# Altium PCB 高压小功率FOC驱动板.PcbDoc (part 2 of 2)
Units mm, origin at the board's own origin, x right, y up, seen from the top; angles counter-clockwise.
Board outline 64 x 64 mm, 4 copper layers (Top Layer, Mid-Layer 1, Mid-Layer 2, Bottom Layer), stack 2.282 mm thick; 170 components, 96 nets, 418 pads, 185 vias.
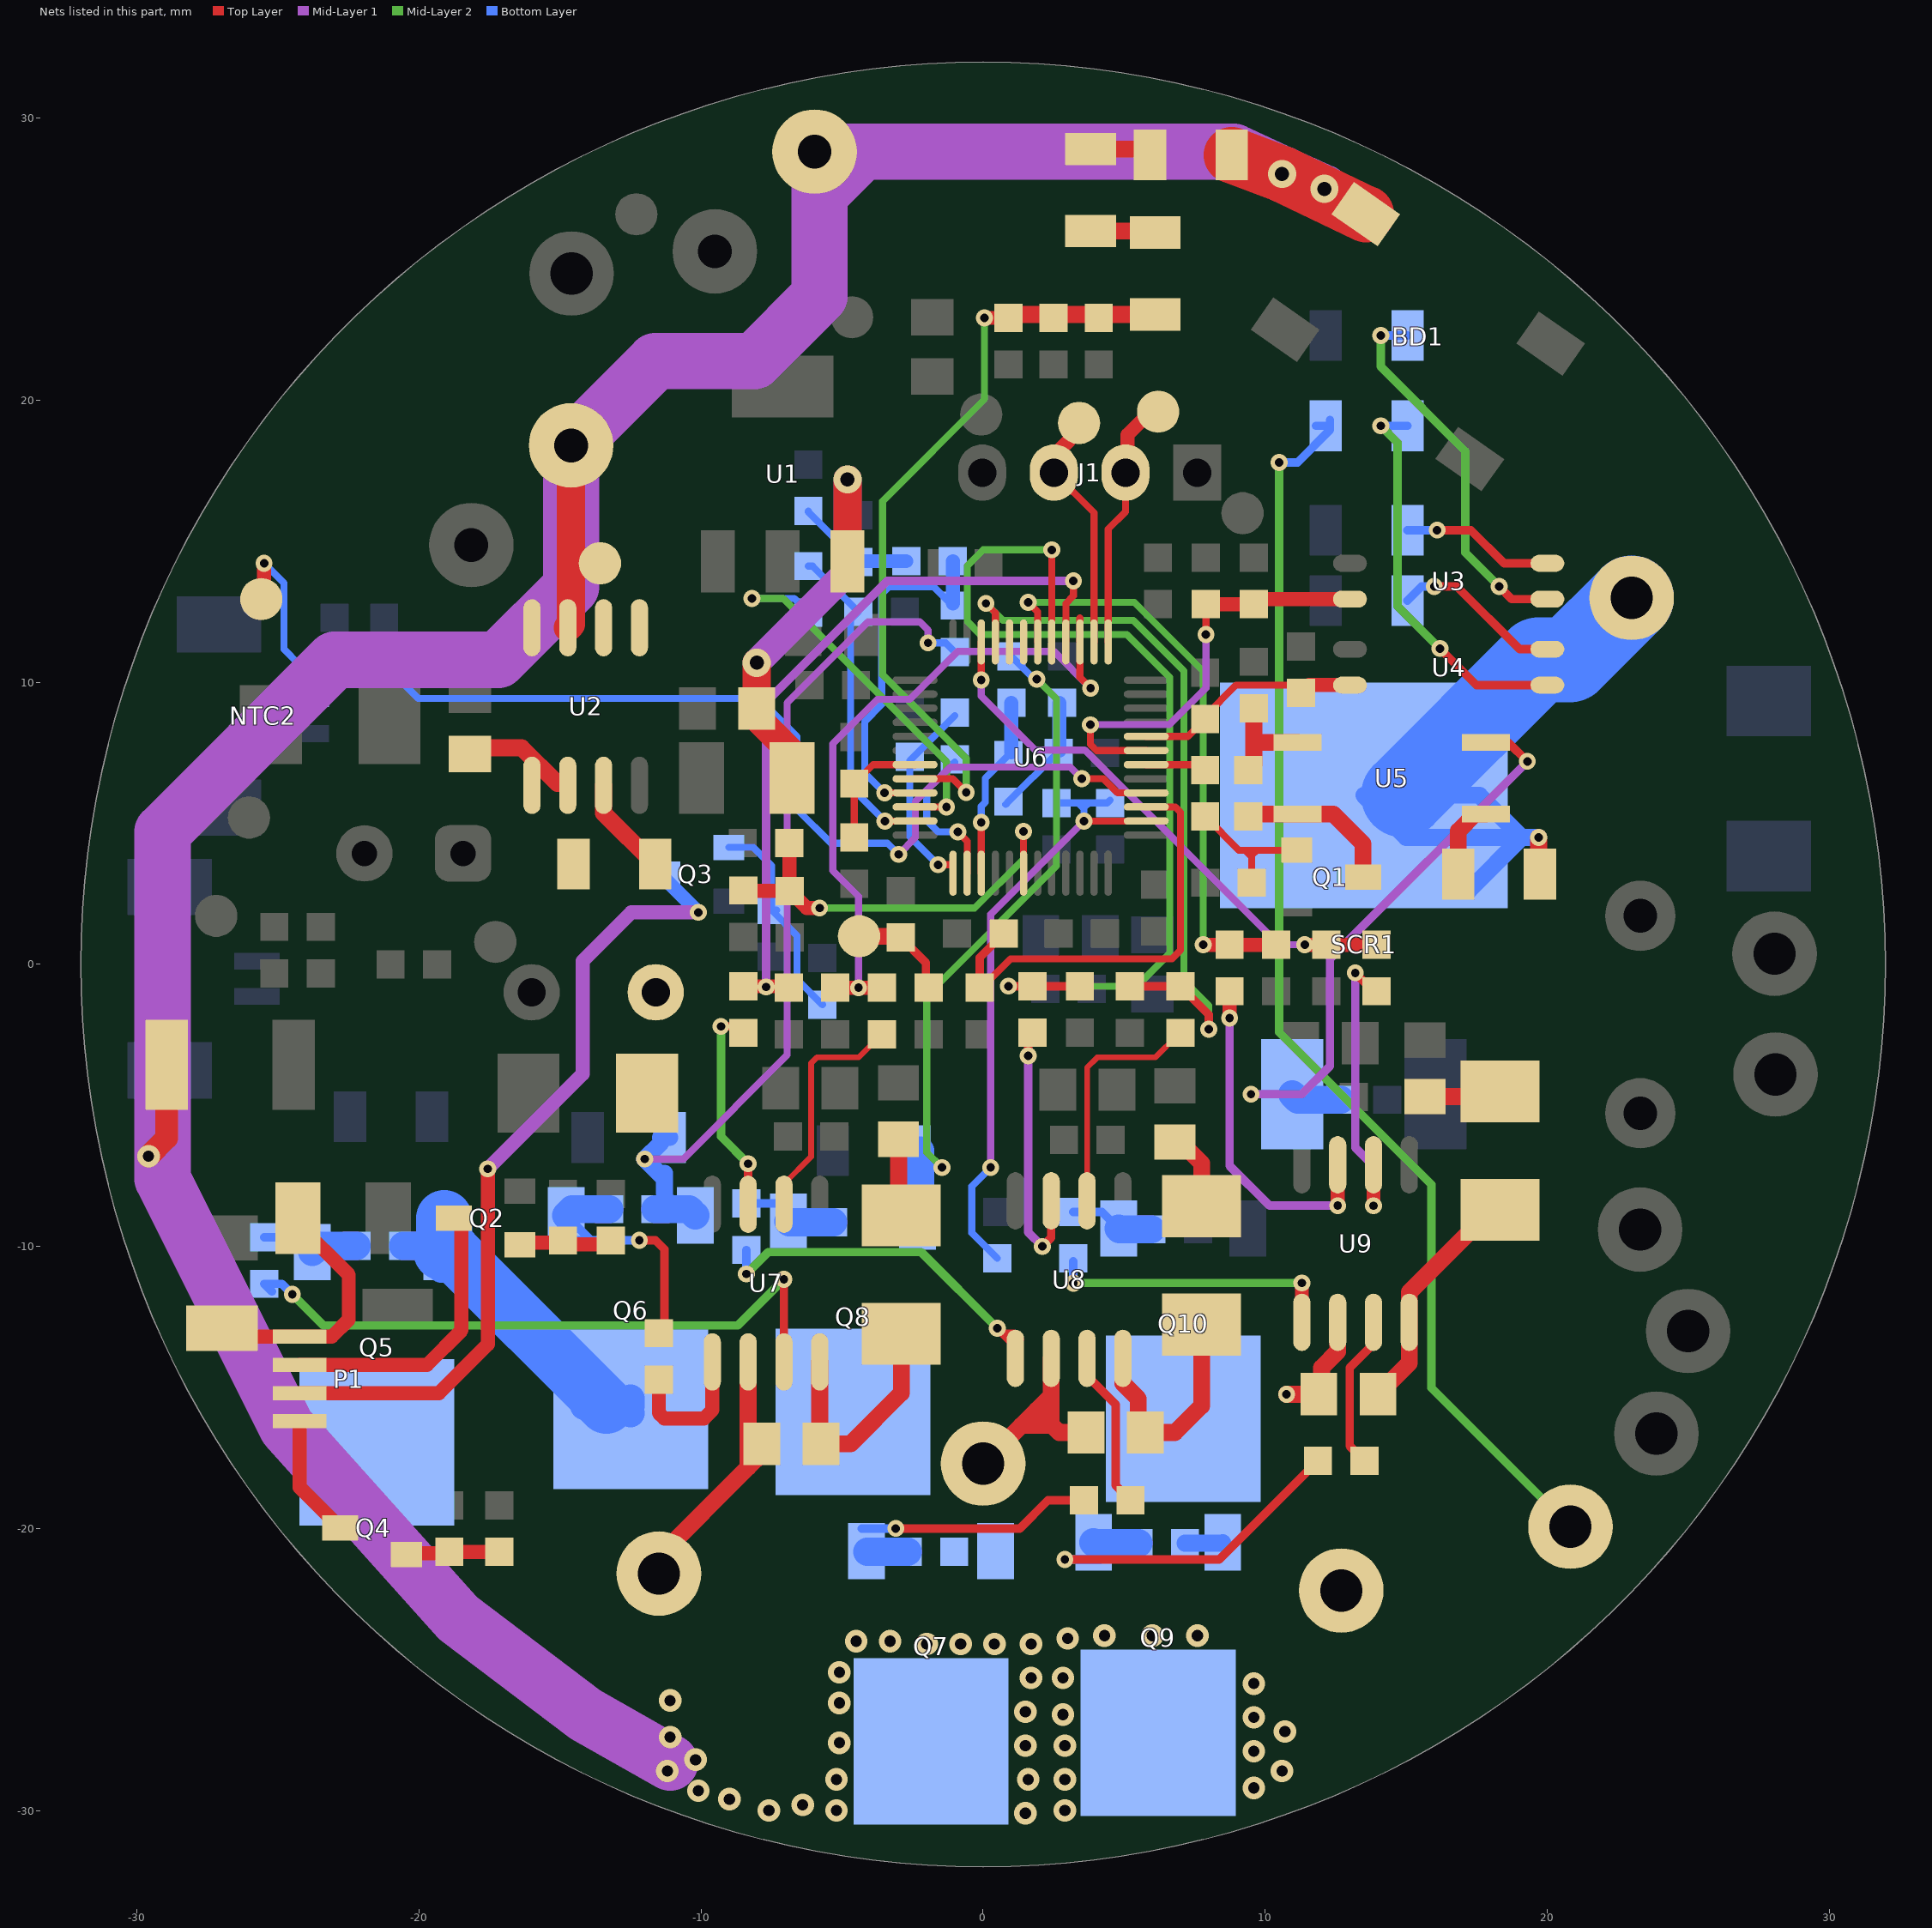
[diagram p4: the nets of this part, all layers, seen from the top]

## Via types
v1: diameter 0.6, hole 0.3, Top Layer to Bottom Layer, tented both sides, 128 vias
v2: diameter 0.8, hole 0.4, Top Layer to Bottom Layer, tented both sides, 40 vias
v3: diameter 1, hole 0.5, Top Layer to Bottom Layer, tented both sides, 17 vias

## Nets (pads, with @x,y where several pads share a name; then routed paths per layer and width w, separated by ;. In a path a pad name is that pad's centre, name@x,y a point inside that pad or via, vN(x,y) a via of type N, cw(c..) or ccw(c..) an arc to the next point about the centre after c; other vN are vias at no path point) (continued)
NetC1_2: C1.2 D2.K L1.1 R1.1 U2.1 U2.2 | length 3.6
  Top Layer w0.6: C1.2@-18.2,7.684 -16.37,7.684 -15.1,6.414
NetC6_2: C6.2 R2.1 U1.3 | length 15.4
  Top Layer w1: v3(-8.031,10.7) C6.2@-8.031,9.075 -8.031,8.75 -6.782,7.501 R2.1@-6.782,6.604 ; U1.3@-4.812,14.289 v3(-4.812,17.2)
  Mid-Layer 1 w1: v3(-8.031,10.7) -4.812,13.919 v3(-4.812,17.2)
NetC17_2: C17.2 NTC2.1 R21.1 Tp6.1 U6.28 | length 43.7
  Top Layer w0.25: Tp6.1@-25.6,12.954 Tp6.1@-25.5,13.054 ; v1(3.5,6.584) 4.266,6.584 4.766,6.084 U6.28@5.783,6.084
  Top Layer w0.5: Tp6.1@-25.5,13.054 v1(-25.5,14.225)
  Mid-Layer 1 w0.25: v1(-3,3.9) -2.4,4.5 -2.4,5.775 -1.175,7 3.084,7 v1(3.5,6.584)
  Bottom Layer w0.25: v1(-25.5,14.225) -24.8,13.525 -24.8,11.175 -24.272,10.647 R21.1@-23,10.647 -23,9.909 NTC2.1@-23.564,9.344 ; C17.2@-21.246,10.647 -20.033,9.434 -7.959,9.434 -6.6,8.075 -6.6,5.5 -5.4,4.3 -3.4,4.3 v1(-3,3.9)
  Bottom Layer w0.5: R21.1@-23,10.647 C17.2@-21.246,10.647
NetC31_1: C31.1 D3.K U7.8 | length 8.6
  Top Layer w0.6: U7.8@-5.795,-14.093 -5.795,-16.955 C31.1@-5.75,-17 -4.7,-17 -2.9,-15.2 D3.K@-2.9,-13.1
NetC34_1: C34.1 D4.K U8.8 | length 8.3
  Top Layer w0.6: U8.8@4.953,-13.969 4.953,-14.853 5.5,-15.4 C34.1@5.5,-16.8 ; C34.1@5.75,-16.6 6.8,-16.6 7.747,-15.653 D4.K@7.747,-12.768
NetC38_1: C38.1 D5.K U9.8 | length 8.2
  Top Layer w0.6: C38.1@14.004,-15.24 15.113,-14.131 U9.8@15.113,-12.691 15.113,-11.625 D5.K@18.034,-8.704
NetD3_A: D3.A R51.2 | length 2.5
  Top Layer w0.6: R51.2@-3,-6.4 -3,-8.8 D3.A@-2.9,-8.9
NetD4_A: D4.A R61.2 | length 2.6
  Top Layer w0.6: R61.2@7,-6.3 7.747,-7.047 D4.A@7.747,-8.568
NetD5_A: D5.A R71.2 | length 2.7
  Top Layer w0.6: R71.2@15.367,-4.683 17.855,-4.683 D5.A@18.034,-4.504
NetF-_1: F-.1 R13.1 SCR1.2 | length 28
  Top Layer w0.6: v1(19.7,4.5) 19.7,3.25 R13.1@19.75,3.2
  Bottom Layer w0.6: SCR1.2@17.25,2.65 19.1,4.5 ; v1(19.7,4.5) 19.1,4.5 ; 19.1,4.5 15,4.5 SCR1.2@13.5,6 14.9,6 17.6,6 19.1,4.5
  Bottom Layer w3: SCR1.2@14.9,6 19.7,10.8 20.8,10.8 F-.1@23,13
NetP1_1: P1.1 Q4.C | length 4.4
  Top Layer w0.5: P1.1@-24.238,-16.2 -24.238,-18.543 Q4.C@-22.803,-19.978
NetP1_2: P1.2 Q3.C | length 29.1
  Top Layer w0.5: P1.2@-24.238,-15.2 -19.3,-15.2 -17.568,-13.468 v1(-17.568,-7.25)
  Mid-Layer 1 w0.5: v1(-17.568,-7.25) -14.2,-3.882 -14.2,0.122 -12.477,1.845 v1(-10.1,1.845)
  Bottom Layer w0.5: Q3.C@-11.375,3.2 -11.375,3.12 v1(-10.1,1.845)
NetP1_3: P1.3 Q2.C | length 10.3
  Top Layer w0.5: P1.3@-24.238,-14.2 -19.725,-14.2 -18.5,-12.975 Q2.C@-18.5,-8.9
NetP1_4: P1.4 R26.2 R27.2 | length 9.2
  Top Layer w0.5: R27.2@-27,-12.9 -26.7,-13.2 P1.4@-24.238,-13.2 -23.1,-13.2 -22.5,-12.6 -22.5,-11 -24.3,-9.2 R26.2@-24.3,-9
NetQ1_B: Q1.B R16.1 R17.1 | length 5.5
  Top Layer w0.25: R16.1@7.874,5.244 9.068,4.05 9.3,4.05 ; R17.1@9.525,2.9 9.525,3.825 ; Q1.B@11.125,4.05 9.7,4.05 ; 9.3,4.05 9.5,4.05 ; 9.3,4.05 9.525,3.825 ; 9.5,4.05 9.7,4.05 ; 9.5,4.05 9.525,4.025 9.525,3.875 ; 9.525,3.825 9.525,3.875 ; 9.525,3.875 9.7,4.05
NetQ1_C: Q1.C R15.1 U5.2 | length 5.7
  Top Layer w0.6: R15.1@9.398,5.244 9.488,5.334 U5.2@11.151,5.334 12.416,5.334 13.475,4.275 Q1.C@13.475,3.1
NetQ2_B: Q2.B R20.1 R22.1 | length 3.4
  Top Layer w0.5: Q2.B@-16.425,-9.943 -16.349,-9.866 -14.977,-9.866 R22.1@-14.9,-9.79 -14.764,-9.926 -13.336,-9.926 R20.1@-13.2,-9.79
NetQ3_B: Q3.B R31.1 R33.1 | length 7.6
  Bottom Layer w0.25: Q3.B@-9.025,4.15 -8.15,4.15 -7.5,3.5 R33.1@-7.5,1.925 ; R33.1@-7.325,1.925 R33.1@-7.5,1.925 ; R31.1@-5.7,-1.425 -6.6,-0.525 -6.6,1.025 R33.1@-7.5,1.925
NetQ4_B: Q4.B R36.1 R37.1 | length 3.3
  Top Layer w0.5: Q4.B@-20.453,-20.928 -20.404,-20.879 -18.983,-20.879 R37.1@-18.934,-20.83 R36.1@-17.156,-20.83
NetQ6_S: Q6.S R28.2 R59.2 R60.2 | length 31.3
  Mid-Layer 1 w0.25: v1(-12,-6.9) -10.636,-6.9 -6.95,-3.214 -6.95,9.275 -4.075,12.15 -2.25,12.15 -1.954,11.854 v1(-1.954,11.4)
  Bottom Layer w0.25: v1(-1.954,11.4) -1.325,11.4 R28.2@-1,11.075
  Bottom Layer w0.6: R60.2@-11.439,-6.339 v1(-12,-6.9) -11.3,-7.6 ; R60.2@-11.439,-6.139 R60.2@-11.123,-6.139 ; -11.3,-8.1 -11.3,-7.4
  Bottom Layer w1: R59.2@-11.621,-8.679 -11.1,-8.679 ; R59.2@-11.123,-8.656 -11.1,-8.679 ; Q6.S@-10.21,-8.9 -10.431,-8.679 -11.1,-8.679
NetQ8_S: Q8.S R42.1 R69.2 R70.2 | length 24.9
  Mid-Layer 2 w0.25: v1(-1.46,-7.2) -2,-6.66 -2,-1.104 2.6,3.496 2.6,9.415 v1(1.9,10.115)
  Bottom Layer w0.25: R42.1@1,10.925 1.81,10.115 v1(1.9,10.115)
  Bottom Layer w1: R69.2@-3.666,-9.144 -2.356,-9.144 Q8.S@-2.328,-9.116 -2.233,-9.021 R70.2@-2.233,-6.604
NetR1_2: R1.2 U2.3 | length 3.6
  Top Layer w0.6: U2.3@-13.462,6.35 -13.462,5.362 -11.656,3.556 R1.2@-11.631,3.556
NetR5_2: R5.2 U3.1 | length 13.5
  Top Layer w0.3: v1(18.3,13.4) 18.746,12.954 U3.1@20.01,12.954
  Mid-Layer 2 w0.3: v1(14.1,22.3) 14.1,21.2 17.1,18.2 17.1,14.6 v1(18.3,13.4)
  Bottom Layer w0.3: v1(14.1,22.3) R5.2@15.05,22.3
NetR7_2: R7.2 U3.2 | length 5.4
  Top Layer w0.3: v1(16.1,15.4) 17.3,15.4 18.476,14.224 U3.2@20.01,14.224
  Bottom Layer w0.3: R7.2@15.05,15.4 v1(16.1,15.4)
NetR9_1: R9.1 S.1 | length 45
  Mid-Layer 2 w0.3: v1(10.5,17.8) 10.5,-2.4 15.9,-7.8 15.9,-15.011 S.1@20.828,-19.939
  Bottom Layer w0.3: v1(10.5,17.8) 11.15,17.8 12.3,18.95 R9.1@12.3,19.3 ; R9.1@11.8,19.1 R9.1@12.15,19.1
NetR9_2: R9.2 U4.1 | length 14.1
  Top Layer w0.3: v1(16.2,11.2) 17.494,9.906 U4.1@20.01,9.906
  Mid-Layer 2 w0.3: v1(14.1,19.1) 14.7,18.5 14.7,12.7 v1(16.2,11.2)
  Bottom Layer w0.3: v1(14.1,19.1) R9.2@15.05,19.1
NetR11_1: R11.1 SCR1.3 U5.4 | length 21.9
  Top Layer w0.3: U5.4@17.826,7.874 18.626,7.874 v1(19.3,7.2)
  Mid-Layer 1 w0.3: v1(9.5,-4.6) 11.303,-4.6 12.3,-3.603 12.3,0.2 v1(19.3,7.2)
  Bottom Layer w0.3: v1(9.5,-4.6) SCR1.3@10.96,-4.6
  Bottom Layer w1: SCR1.3@10.96,-4.6 11.16,-4.8 R11.1@12.675,-4.8
NetR12_2: R12.2 U4.2 | length 6.1
  Top Layer w0.3: v1(16,13.4) 16.8,13.4 19.024,11.176 U4.2@20.01,11.176
  Bottom Layer w0.3: R12.2@15.05,12.9 15.55,13.4 v1(16,13.4)
NetR13_2: R13.2 U5.3 | length 2.8
  Top Layer w0.6: R13.2@16.85,3.2 16.85,4.734 17.45,5.334 U5.3@17.826,5.334
NetR14_1: R14.1 R15.2 U5.1 | length 3.8
  Top Layer w0.6: R15.2@9.398,6.894 9.6,7.096 R14.1@9.6,9.081 ; 9.6,7.874 U5.1@11.151,7.874
NetR23_2: R23.2 R81.2 R82.1 | length 4.2
  Bottom Layer w0.25: R81.2@-6.2,16.075 -6.2,16.05 R82.1@-4.425,14.275 R82.1@-4.4,14.3
  Bottom Layer w0.5: R82.1@-4.4,14.3 R23.2@-2.725,14.3
NetR30_2: R30.2 R32.2 Tp7.1 | length 3.6
  Top Layer w0.3: R30.2@-2.921,0.953 -2.032,0.064 R32.2@-2.032,-0.826
  Top Layer w0.6: Tp7.1@-4.4,1 -2.968,1 R30.2@-2.921,0.953
NetR39_2: R39.2 R41.1 | length 2.2
  Top Layer w0.6: R41.1@3.81,28.909 5.709,28.909 R39.2@5.916,28.702
NetR41_2: R41.2 R44.1 | length 2.3
  Top Layer w0.6: R41.2@3.81,26.009 6.041,26.009 R44.1@6.1,25.95
NetR43_2: R43.2 R83.2 R84.1 | length 4.4
  Bottom Layer w0.25: R43.2@0.8,5.675 R43.2@0.9,5.775 R84.1@2.625,7.5 ; R84.1@2.675,7.5 R84.1@2.625,7.5 ; R84.1@2.7,7.575 R84.1@2.625,7.5
  Bottom Layer w0.5: R84.1@2.7,7.575 R83.2@2.7,9.275
NetR54_1: R54.1 U7.7 | length 23
  Top Layer w0.3: U7.7@-7.065,-14.093 v1(-7.065,-11.165)
  Mid-Layer 2 w0.3: v1(-24.5,-11.7) -23.4,-12.8 -8.7,-12.8 v1(-7.065,-11.165)
  Bottom Layer w0.3: R54.1@-25.225,-11.6 R54.1@-25.5,-11.325 -24.875,-11.325 v1(-24.5,-11.7)
NetR57_1: R57.1 U7.5 | length 5
  Top Layer w0.5: R57.1@-11.5,-14.725 -11.5,-15.91 -11.31,-16.1 -9.9,-16.1 -9.605,-15.805 U7.5@-9.605,-14.093
NetR64_1: R64.1 U8.7 | length 5.7
  Top Layer w0.3: U8.7@3.683,-13.969 3.683,-14.583 4.7,-15.6 4.7,-18.475 R64.1@5.225,-19
NetR67_1: R67.1 U8.5 | length 13.2
  Top Layer w0.3: v1(0.5,-12.9) v1@0.7,-13.1 ; U8.5@1.143,-13.969 1.143,-13.543 v1@0.7,-13.1 ; U8.5@1.3,-13.3 1.1,-13.1 v1@0.7,-13.1
  Mid-Layer 2 w0.3: v1(-8.4,-10.977) -7.623,-10.2 -2.2,-10.2 v1(0.5,-12.9)
  Bottom Layer w0.3: v1(-8.4,-10.977) R67.1@-8.4,-10.125
NetR74_1: R74.1 U9.7 | length 5.5
  Top Layer w0.3: R74.1@13.525,-17.6 13,-17.075 13,-14.3 13.843,-13.457 U9.7@13.843,-12.691
NetR77_1: R77.1 U9.5 | length 10.4
  Top Layer w0.5: U9.5@11.303,-12.691 v1(11.303,-11.297)
  Mid-Layer 2 w0.3: v1@3.2,-11.297 v1(11.303,-11.297)
  Bottom Layer w0.3: v1@3.2,-11.4 R77.1@3.2,-10.525
  other v1: 3.2,-11.3
NRST: C15.1 R18.2 U6.7 | length 4.3
  Top Layer w0.25: R18.2@-4.572,4.508 C15.1@-4.572,6.414 -3.902,7.084 U6.7@-2.417,7.084
NTC: C28.2 NTC.1 R45.2 U6.26 | length 22.9
  Top Layer w0.25: v1(3.575,5.084) U6.26@5.783,5.084
  Mid-Layer 1 w0.25: v1(0.268,-7.2) 0.268,1.777 v1(3.575,5.084)
  Bottom Layer w0.25: v1(0.268,-7.2) -0.4,-7.868 -0.4,-9.525 NTC.1@0.5,-10.425 ; R45.2@2.6,5.725 3.375,5.725 ; v1(3.575,5.084) 3.575,5.525 ; C28.2@4.5,5.825 4.4,5.725 3.738,5.725 ; 3.375,5.725 3.575,5.525 ; 3.375,5.725 3.5,5.725 ; 3.5,5.725 3.738,5.725 ; 3.5,5.725 3.575,5.65 3.575,5.562 ; 3.575,5.525 3.575,5.562 ; 3.575,5.562 3.738,5.725
OP1_VINM: R25.1 R29.2 U6.11 | length 11.5
  Top Layer w0.25: v1(-3.484,5.084) U6.11@-2.417,5.084
  Bottom Layer w0.25: R25.1@-6.2,14.125 -6.05,14.125 R29.2@-4.425,12.5 -4.7,12.225 -4.7,6.3 v1(-3.484,5.084)
OP1_VINP: R23.1 R28.1 U6.9 | length 13
  Top Layer w0.25: v1(-3.494,6.084) U6.9@-2.417,6.084
  Bottom Layer w0.25: v1(-3.494,6.084) -4.2,6.79 -4.2,8.616 -3.6,9.216 -3.6,13.135 -3.35,13.385 -1.748,13.385 R28.1@-1.2,12.837 ; R28.1@-1.075,12.8 R28.1@-1,12.725
  Bottom Layer w0.5: R28.1@-1.075,12.8 R23.1@-1.075,14.3
OP1_VOUT: R25.2 U6.10 | length 14.2
  Top Layer w0.25: U6.10@-2.417,5.584 v1(-1.3,5.584)
  Mid-Layer 2 w0.25: v1(-8.2,12.975) -7.091,12.975 -1.3,7.184 v1(-1.3,5.584)
  Bottom Layer w0.25: v1(-8.2,12.975) -6.7,12.975 R25.2@-6.2,12.475
OP2_VINM: R38.1 R40.1 U6.13 | length 6.9
  Top Layer w0.25: v1(-1.6,3.534) U6.13@-1.067,3.534
  Bottom Layer w0.25: v1(-1.6,3.534) -2.6,4.534 -2.6,7.159 -2.6,7.225 R38.1@-1,8.825
OP2_VINP: R42.2 R43.1 U6.15 | length 6.5
  Top Layer w0.25: U6.15@-0.067,3.234 v1(-0.067,5.033)
  Bottom Layer w0.25: v1(-0.067,5.033) -0.067,5.608 0.075,5.75 0.075,6.6 R43.1@0.9,7.425 R43.1@1,7.525
  Bottom Layer w0.5: R43.1@1,7.525 R42.2@1,9.275
OP2_VOUT: R38.2 U6.14 | length 5.4
  Top Layer w0.25: v1(-0.9,4.7) -0.567,4.367 U6.14@-0.567,3.234
  Bottom Layer w0.25: R38.2@-1,7.084 -1,7.175 -2,6.175 -2,5.1 -1.6,4.7 v1(-0.9,4.7)
OP3_VINP: C18.1 R24.1 U6.27 | length 16
  Top Layer w0.25: C18.1@0,-0.772 0.972,0.2 6.7,0.2 7,0.5 7,5.4 6.816,5.584 U6.27@5.783,5.584
  Top Layer w0.3: C18.1@-0.127,-0.826 -0.127,0.248 R24.1@0.725,1.1
SWCLK1: J1.3 Tp3.1 U6.38 | length 8.7
  Top Layer w0.25: J1.3@2.508,17.439 3.933,16.014 U6.38@3.933,11.434
  Top Layer w0.3: J1.3@2.508,17.439 J1.3@2.508,17.935
  Top Layer w0.5: J1.3@2.508,17.935 2.529,17.935 2.738,18.143 2.738,18.267 3.4,18.929 Tp3.1@3.4,19.2
SWDIO1: J1.2 Tp2.1 U6.37 | length 9.1
  Top Layer w0.25: U6.37@4.433,11.434 4.433,15.433 5.048,16.048 J1.2@5.048,17.439
  Top Layer w0.5: J1.2@5.048,17.439 5.121,17.512 5.121,18.779 5.942,19.6 Tp2.1@6.204,19.6
TIM1_CH1: R16.2 U6.30 | length 2.2
  Top Layer w0.25: U6.30@5.783,7.084 7.684,7.084 R16.2@7.874,6.894
TIM1_CH2: C10.1 R4.1 U3.4 U6.31 | length 15.4
  Top Layer w0.25: v1(3.8,8.5) 3.8,7.8 4.016,7.584 U6.31@5.783,7.584 ; v1(7.9,11.7) C10.1@7.9,12.575 ; R4.1@9.6,12.775 9.6,12.908 R4.1@9.646,12.954
  Top Layer w0.5: C10.1@7.9,12.775 R4.1@9.6,12.775 ; R4.1@9.646,12.954 U3.4@13.01,12.954
  Mid-Layer 1 w0.25: v1(3.8,8.5) 6.602,8.5 7.9,9.798 v1(7.9,11.7)
TIM1_CH3: C11.1 R8.2 U4.4 U6.32 | length 8.4
  Top Layer w0.25: U6.32@5.783,8.084 7.258,8.084 C11.1@7.874,8.7 7.874,8.815 8.965,9.906 R8.2@11.5,9.906
  Top Layer w0.5: R8.2@11.269,9.625 11.55,9.906 U4.4@13.01,9.906
TIM8_BKIN: U6.44
TIM8_BKIN2: U6.43
TIM8_CH1: R52.1 R53.1 U6.39 | length 24.4
  Top Layer w0.25: 3.433,12.283 U6.39@3.433,11.434 3.433,10.177 v1(3.81,9.8)
  Top Layer w0.5: R53.1@-5.245,-0.826 v1(-4.42,-0.826) R52.1@-3.594,-0.826
  Mid-Layer 1 w0.25: v1(-4.42,-0.826) -4.42,2.42 -5.334,3.334 -5.334,7.816 -3.75,9.4 -2.6,9.4 -0.9,11.1 2.51,11.1 v1(3.81,9.8)
TIM8_CH1N: R56.1 R58.1 U6.40 | length 26.7
  Top Layer w0.25: U6.40@2.933,11.434 2.933,12.799 3.2,13.066 v1(3.2,13.6)
  Top Layer w0.3: R58.1@-6.947,-0.775 R58.1@-6.896,-0.826
  Top Layer w0.5: R56.1@-8.5,-0.775 R58.1@-6.947,-0.775
  Mid-Layer 1 w0.3: v1(-7.696,-0.8) -7.696,9.304 -3.4,13.6 v1(3.2,13.6)
TIM8_CH2: R62.1 R63.1 U6.45 | length 26.3
  Top Layer w0.25: v1(0.1,12.8) 0.433,12.467 U6.45@0.433,11.434
  Top Layer w0.3: R63.1@5.2,-0.775 R62.1@7,-0.775 8,-1.775 v1(8,-2.3)
  Mid-Layer 2 w0.25: v1(0.1,12.8) 0.7,12.2 5.325,12.2 7.117,10.408 7.117,-0.576 8,-1.459 v1(8,-2.3)
TIM8_CH2N: R66.1 R68.1 U6.41 | length 35
  Top Layer w0.25: U6.41@2.433,11.434 v1(2.433,14.7)
  Top Layer w0.3: v1(0.9,-0.772) R66.1@1.751,-0.772 R68.1@3.429,-0.772
  Mid-Layer 2 w0.25: v1(0.9,-0.772) 5.451,-0.772 6.617,0.394 6.617,10.183 5.1,11.7 -0.1,11.7 -0.567,12.167 -0.567,14.133 0,14.7 v1(2.433,14.7)
TIM8_CH3: R72.1 R73.1 U6.46 | length 19.6
  Top Layer w0.25: v1(-0.067,10.084) U6.46@-0.067,11.434
  Top Layer w0.5: v1(11.405,0.698) R73.1@12.17,0.698 R72.1@13.948,0.698
  Mid-Layer 1 w0.25: v1(-0.067,10.084) -0.067,9.513 1.846,7.6 3.6,7.6 10.502,0.698 v1(11.405,0.698)
TIM8_CH3N: R76.1 R78.1 U6.42 | length 21.2
  Top Layer w0.25: v1(1.6,12.837) 1.933,12.504 U6.42@1.933,11.434
  Top Layer w0.3: v1@7.8,0.7 v1(7.802,0.698) ; R76.1@8.6,0.839 R76.1@8.741,0.698
  Top Layer w0.5: v1(7.802,0.698) R76.1@8.741,0.698 R78.1@10.392,0.698
  Mid-Layer 2 w0.25: v1(1.6,12.837) 5.363,12.837 7.802,10.398 v1(7.802,0.698)
U: C31.2 Q5.S Q6.D R55.2 U7.6 U.1 | length 24.3
  Top Layer w0.6: U.1@-11.5,-21.6 -11.5,-21 -8.335,-17.835 ; U7.6@-8.335,-14.093 C31.2@-8.335,-16.515 ; -8.335,-17.835 -7.85,-17.35 C31.2@-7.85,-17 C31.2@-8.335,-16.515 ; -8.335,-17.835 C31.2@-8.335,-16.515
  Bottom Layer w1: R55.2@-20.568,-9.979 -19.431,-9.979 Q5.S@-19.21,-10.2 Q5.S@-19.21,-10.79 ; Q6.D@-14.15,-15.65 -13.367,-15.65 Q6.D@-12.76,-15.65 ; Q6.D@-12.5,-15.91 Q6.D@-12.76,-15.65 ; Q6.D@-12.5,-15.4 Q6.D@-12.5,-15.65 Q6.D@-12.76,-15.65
  Bottom Layer w2: Q5.S@-19.21,-10.2 Q5.S@-18.817,-10.2 ; -19.118,-9 -19.118,-9.899 Q5.S@-18.817,-10.2 ; Q5.S@-18.8,-10.2 Q5.S@-18.817,-10.2 ; Q6.D@-13.367,-15.65 Q5.S@-18.817,-10.2
UH: Q5.G R54.2 R55.1 | length 3.6
  Bottom Layer w0.3: R54.2@-25.5,-9.675 -24.315,-9.675 Q5.G@-23.79,-10.2
  Bottom Layer w1: Q5.G@-23.79,-10.2 -23.569,-9.979 R55.1@-22.218,-9.979
UH_PWM: R52.2 U7.2 | length 8.3
  Top Layer w0.2: U7.2@-7.065,-8.505 -7.065,-7.782 -6.1,-6.817 -6.1,-3.5 -5.9,-3.3 -4.418,-3.3 R52.2@-3.594,-2.476
UL: Q6.G R57.2 R59.1 | length 10.6
  Top Layer w0.3: v1(-12.192,-9.779) -11.621,-9.779 -11.3,-10.1 -11.3,-12.875 R57.2@-11.5,-13.075
  Bottom Layer w0.3: Q6.G@-14.79,-8.9 -13.911,-9.779 ; Q6.G@-14.721,-9.779 -13.911,-9.779 ; R59.1@-13.6,-9.008 R59.1@-13.271,-8.679 ; -13.2,-9.779 -13.911,-9.779 ; v1(-12.192,-9.779) -13.911,-9.779
  Bottom Layer w1: Q6.G@-14.79,-8.9 -14.569,-8.679 R59.1@-13.271,-8.679
UL_PWM: R56.2 U7.3 | length 7.6
  Top Layer w0.3: v1(-9.3,-2.2) -8.725,-2.2 R56.2@-8.5,-2.425 ; U7.3@-8.335,-8.505 v1(-8.335,-7.065)
  Mid-Layer 2 w0.3: v1(-9.3,-2.2) -9.3,-6.1 v1(-8.335,-7.065)
V: C34.2 Q7.S Q8.D R65.2 U8.6 V.1 | length 8.9
  Top Layer w0.6: V.1@0,-17.7 1.35,-16.35 ; U8.6@2.413,-13.969 2.413,-15.287 ; C34.2@3.65,-16.6 2.7,-16.6 2.45,-16.35 ; 1.35,-16.35 2.45,-16.35 ; 1.35,-16.35 1.9,-15.8 ; 1.9,-15.8 2.413,-15.287 ; 1.9,-15.8 2.413,-16.313 ; 2.413,-16.313 2.413,-15.287 ; 2.413,-16.313 2.45,-16.35
V15: C27.1 R46.2 R50.2 U6.18 | length 15.1
  Top Layer w0.25: U6.18@1.433,3.234 v1(1.433,4.717)
  Top Layer w0.5: R50.2@-8.5,2.625 -8.478,2.603 C27.1@-6.858,2.603 ; R46.2@-6.875,4.3 -6.875,2.62 C27.1@-6.858,2.603 ; v1(-5.8,2) -6.255,2 C27.1@-6.858,2.603
  Mid-Layer 2 w0.25: v1(-5.8,2) -0.3,2 1.433,3.733 v1(1.433,4.717)
VBAT: C26.1 R44.2 R47.2 R48.2 U6.8 | length 27.7
  Top Layer w0.25: U6.8@-2.417,6.584 -1.084,6.584 v1(-0.6,6.1)
  Top Layer w0.5: v1(0.043,22.925) C26.1@0.9,22.925
  Top Layer w0.6: C26.1@0.9,22.925 1.025,23.05 R44.2@6.1,23.05
  Mid-Layer 2 w0.25: v1(-0.6,6.1) -0.6,7.3 -3.566,10.266 -3.566,16.434 0.043,20.043 v1(0.043,22.925)
VBUS: 310V.1 BD1.1 C2.1 C3.1 C36.1 Q5.D Q7.D Q9.D R39.1 U2.5 U2.6 U2.7 U2.8 | length 115.5
  Top Layer w0.8: v2(-29.6,-6.8) -28.956,-6.156 C36.1@-28.956,-3.556
  Top Layer w1: U2.7@-14.732,11.938 -14.615,12.055 C3.1@-14.615,18.405
  Top Layer w2: R39.1@8.816,28.702 v3(10.6,28.03) 12.026,27.346 BD1.1@13.573,26.604
  Mid-Layer 1 w2: v2@-11.1,-28.3 -14.1,-26.6 -18.6,-23.2 -24.7,-16.4 -29.1,-7.6 -29.1,4.7 -23,10.8 -17.2,10.8 -14.615,13.385 C3.1@-14.615,18.405 -11.62,21.4 -8.1,21.4 -5.8,23.7 -5.8,27.3 ; C2.1@-5.979,28.819 C2.1@-5.8,28.819 ; C2.1@-5.8,29 C2.1@-5.8,28.819 ; v3@12.04,27.37 v3(10.6,28.03) 8.881,28.819 -4.281,28.819 ; -5.8,27.3 -4.281,28.819 ; -5.8,27.3 C2.1@-5.8,28.819 ; C2.1@-5.8,28.819 -4.281,28.819
  other v2: 1.5,-30.1 -7.6,-30 -5.2,-30 2.9,-30 -6.4,-29.8 -9,-29.6 -10.1,-29.3 9.6,-29.2 -5.2,-28.9 1.6,-28.9 2.9,-28.9 -11.2,-28.6 10.6,-28.6 -10.2,-28.2 9.6,-27.9 1.5,-27.7 2.9,-27.7 -5.1,-27.6 -11.1,-27.4 10.7,-27.2 9.6,-26.7 2.829,-26.6 1.5,-26.5 -5.1,-26.188 -11.1,-26.1 9.6,-25.5 1.7,-25.3 2.829,-25.3 -5.1,-25.1 -2,-24.1 -0.8,-24.1 0.4,-24.1 1.7,-24.1 -4.5,-24 -3.3,-24 3,-23.9 4.3,-23.8 6,-23.8 7.6,-23.8
  other v3: 12.1,27.5
VH: Q7.G R64.2 R65.1 | length 9.8
  Top Layer w0.3: v1(-3.1,-20) 1.3,-20 2.3,-19 R64.2@3.575,-19
  Bottom Layer w0.3: Q7.G@-4.3,-20 v1(-3.1,-20)
  Bottom Layer w0.6: Q7.G@-4.141,-20.8 Q7.G@-4.113,-20.828
  Bottom Layer w1: Q7.G@-4.113,-20.828 R65.1@-2.676,-20.828
VH_PWM: R62.2 U8.2 | length 8.4
  Top Layer w0.2: U8.2@3.683,-8.381 3.683,-3.661 4.044,-3.3 6.1,-3.3 R62.2@6.9,-2.5
VL: Q8.G R67.2 R69.1 | length 3
  Bottom Layer w0.3: R67.2@-8.4,-8.475 Q8.G@-7,-8.475
  Bottom Layer w1: Q8.G@-6.908,-9.116 -6.88,-9.144 R69.1@-5.316,-9.144
VL_PWM: R66.2 U8.3 | length 9.6
  Top Layer w0.3: v1(1.6,-3.244) 1.6,-2.473 R66.2@1.651,-2.422 ; v1(2.1,-10) 2.413,-9.687 U8.3@2.413,-8.381
  Mid-Layer 1 w0.3: v1(1.6,-3.244) 1.6,-9.5 v1(2.1,-10)
W: C38.2 Q9.S Q10.D R75.2 U9.6 W.1 | length 5.1
  Top Layer w0.6: v1(10.76,-15.24) C38.2@11.904,-15.24 ; C38.2@12,-15.1 12,-14.3 12.573,-13.727 U9.6@12.573,-12.691
  Bottom Layer w0.6: R75.2@7.156,-20.523 8.466,-20.523 Q9.S@8.494,-20.495
WH: Q9.G R74.2 R75.1 | length 13.3
  Top Layer w0.3: v1(2.9,-21.1) 8.375,-21.1 R74.2@11.875,-17.6
  Bottom Layer w0.3: v1(2.9,-21.1) Q9.G@4.15,-21.1
  Bottom Layer w0.6: R75.1@5.478,-20.495 R75.1@5.506,-20.523
  Bottom Layer w1: Q9.G@3.914,-20.495 3.942,-20.523 R75.1@5.506,-20.523
WH_PWM: R72.2 U9.2 | length 11
  Top Layer w0.3: v1(13.196,-0.3) 13.848,-0.952 R72.2@13.948,-0.952
  Top Layer w0.5: v1(13.843,-8.557) U9.2@13.843,-7.103
  Mid-Layer 1 w0.3: v1(13.196,-0.3) 13.196,-6.496 13.843,-7.143 v1(13.843,-8.557)
WL: Q10.G R77.2 R79.1 | length 3
  Bottom Layer w0.3: R77.2@3.2,-8.775 4.216,-8.775 Q10.G@4.806,-9.365
  Bottom Layer w1: Q10.G@4.806,-9.365 4.834,-9.393 R79.1@5.971,-9.393
WL_PWM: R76.2 U9.3 | length 12.1
  Top Layer w0.5: v1(8.741,-1.9) R76.2@8.741,-0.952 ; v1(12.573,-8.554) U9.3@12.573,-7.103
  Mid-Layer 1 w0.3: v1(8.741,-1.9) 8.741,-7.141 10.154,-8.554 v1(12.573,-8.554)
pads on no net: NTC2.Z0 P1.Z0 SW.Z0 U6.6 U6.22 U6.25 U6.29 U6.33 U6.34

## Polygon pours and split planes (outlines as drawn)
GND on Bottom Layer "Bottom Layer-No Net" (solid, remove dead copper, pour order 40): 3.3,4.6 3.3,-3.125 3.933,-3.758 6.342,-3.758 7.1,-3 7.1,0.1 6.4,0.8 5.8,1.4 5.8,2 5.8,2.398 5.225,2.973 5.225,4.75 5.2,4.775 3.475,4.775 3.3,4.6
+3V3 on Bottom Layer "Bottom Layer-No Net" (solid, remove dead copper, pour order 16): -9.4,15.8 -10.6,17 -10.6,20.2 -8.2,22.6 -1.9,22.6 -1.075,21.775 -1.075,16.875 -0.5,16.3 6.14,16.3 7,17.16 8.94,17.16 9.6,16.5 9.6,11.9 9.3,11.6 7,11.6 5,9.6 2.325,9.6 -0.4,12.325 -0.4,14.5 -0.9,15 -2.733,15 -3.533,15.8
+3V3 on Bottom Layer "Bottom Layer-No Net" (solid, remove dead copper, pour order 20): -5.316,3.6 -5.316,1.416 -3.9,0 -1.1,0 0.8,-1.9 3,-1.9 3.3,-1.6 3.3,4.4 2.9,4.8 0.9,4.8 0.3,4.2 -0.6,4.2 -1.1,3.7 -5.216,3.7
VBUS on Bottom Layer "Bottom Layer-No Net" (solid, remove dead copper, pour order 4): -5.4,-23.5 -6.3,-24.4 -6.3,-27.4 -7.2,-28.3 -8.8,-28.3 -9.8,-27.3 -9.8,-26.2 -10.4,-25.6 -13.4,-25.6 -17.5,-21.5 -17.5,-15.2 -19.5,-13.2 -24.65,-13.2 -25.75,-14.3 -25.75,-18.205 -25.665,-18.326 -20.502,-24.44 -16.6,-26.708 -11.6,-29.3 -7.9,-30.5 -7.6,-30.6 7.7,-30.6 9.9,-29.9 11.2,-29 11.2,-26.3 8.4,-23.5
GND on Mid-Layer 1 "Bottom Layer-No Net" (solid, remove dead copper, pour order 46): 3.5,3.534 2.1,2.134 2.1,-1.6 4.4,-3.9 10.5,-3.9 11.6,-2.8 11.6,-0.695 11.005,-0.1 10.322,-0.1 6.688,3.534
GND on Mid-Layer 1 "Bottom Layer-No Net" (solid, remove dead copper, pour order 38): -23.7,1.6 -24,1.9 -24,4.1 -20.416,7.684 -14.912,7.684 -10.896,11.7 -9.8,11.7 -9.385,11.285 -9.385,8.815 -12.9,5.3 -19.7,5.3 -20.6,4.4 -20.6,2.943 -21.943,1.6
GND on Mid-Layer 1 "Bottom Layer-No Net" (solid, remove dead copper, pour order 34): -11.1,8.6 -12.3,9.8 -11.4,10.7 -11.4,15.2 -10.6,16 -9.072,16 -7.5,17.572 -7.5,18.3 -4.2,21.6 6.5,21.6 8.8,19.3 8.8,12.904 7.6,11.704 7.6,9.498 6.702,8.6
VBUS on Mid-Layer 1 "Bottom Layer-No Net" (solid, remove dead copper, pour order 2): -15.1,-23.9 -10.1,-23.9 -8.9,-22.7 8.9,-22.7 11.3,-25.1 11.3,-28.9 10.5,-29.7 7.8,-30.5 -8.5,-30.5 -15.2,-27.8 -18.4,-25.8 -25.8,-17.871 -25.8,-12.9 -17.056,-21.579 -17.056,-21.7
GND on Top Layer "Bottom Layer-No Net" (solid, remove dead copper, pour order 42): 7.7,-2.9 7.9,-2.7 9,-2.7 9.1,-2.7 9.6,-2.2 9.6,-0.617 9.9,-0.317 12.717,-0.317 12.8,-0.4 12.8,-4.9 12,-5.7 11.377,-6.323 11.125,-6.323 10.502,-5.7 9.425,-5.7 9.2,-5.7 8.1,-4.6 7.7,-4.2 7.7,-2.9
GND on Top Layer "Bottom Layer-No Net" (solid, remove dead copper, pour order 32): -0.932,10.65 -0.932,6.632 0.1,5.6 1.4,4.3 1.4,2.932 1.4,2.424 1.524,2.3 2.2,2.3 2.3,2.4 2.96,2.4 3.4,1.96 3.433,1.927 3.433,0.5 6.6,0.5 6.9,0.8 6.9,1.718 6.518,2.1 4.688,2.1 4.488,2.3 4.488,4.478 4.266,4.7 4.066,4.9 3.391,4.9 3.391,7.991 3.9,8.5 4.563,8.5 5.113,9.05 7.825,9.05 8.4,9.625 8.9,10.125 8.9,10.7 8.9,11.238 8.2,11.938 8.138,12 7.53,12 7.4,12.13 7.4,13.312 7.588,13.5 8.6,13.5 8.816,13.716 8.816,14.1 8.816,15.145 8.3,15.661 7.161,16.8 6,16.8 5.8,16.8 5.5,16.5 4.9,15.9 4.9,15.3 4.9,14.3 5.6,13.6 6.1,13.6 6.6,13.1 6.6,10.916 6.384,10.7 -0.881,10.7 -0.932,10.65
GND on Top Layer "Bottom Layer-No Net" (solid, remove dead copper, pour order 30): -0.9,9.971 -0.9,16.359 -1.141,16.6 -1.141,17.448 -2.5,18.807 -2.775,19.082 -2.775,21.5 4.344,21.5 4.744,21.1 4.744,20.683 4.361,20.3 4.261,20.2 3.1,20.2 1.9,20.2 1.3,19.6 1.3,13.8 0.8,13.3 0.233,13.3 -0.067,13 -0.067,10.033 -0.2,9.9 -0.829,9.9 -0.9,9.971
+3V3 on Top Layer "Bottom Layer-No Net" (solid, remove dead copper, pour order 10): 6.2,9.906 6.202,14 5,14 4.519,13.519 4.519,10.919 4.09,10.49 3.7,10.49 3.7,9.91 3.81,9.8 4.794,9.8 4.9,9.906
+3V3 on Top Layer "Bottom Layer-No Net" (solid, remove dead copper, pour order 14): 4.433,4.2 4.3,4.067 4.3,3.556 4.3,2.488 4.488,2.3 6.6,2.3 6.7,2.4 6.7,3.9 6.4,4.2 4.433,4.2
+3V3 on Top Layer "Bottom Layer-No Net" (solid, remove dead copper, pour order 12): 2.3,4.4 2.1,4.2 2.1,2.4 2.1,0.6 2.2,0.5 3.2,0.5 3.4,0.7 3.4,4.3 3.3,4.4 3.259,4.359 2.245,4.359
+3V3 on Top Layer "Bottom Layer-No Net" (solid, remove dead copper, pour order 6): -7.8,13.7 -7.8,15.3 -8.1,15.6 -10.34,15.6 -10.622,15.882 -10.622,20.878 -9.7,21.8 -9.4,22.1 -8.058,22.1 -6.858,23.3 -5.958,24.2 -2,24.2 -1.2,24.2 -0.7,23.7 -0.7,22.115 -0.8,22.015 -2.485,22.015 -2.7,21.8 -2.7,19.346 -1.954,18.6 -0.8,17.446 -0.8,15.661 -0.8,10.1 -1.2,9.7 -3.234,9.7 -3.434,9.5 -3.634,9.3 -4.4,9.3 -5.3,9.3 -5.4,9.4 -5.4,12.346 -5.638,12.584 -7.659,12.584 -7.8,12.725 -7.8,13.7
GND on Top Layer "Bottom Layer-No Net" (solid, remove dead copper, pour order 26): -10.1,15.5 -10.1,10.5 -10.8,9.8 -10.8,8.3 -10.7,8.2 -9,8.2 -8.8,8.4 -8.4,8.8 -8.4,10.9 -7.575,10.9 -7.5,10.825 -7.5,8.9 -6,7.4 -3.984,7.4 -3.7,7.684 -3.7,8.416 -4.284,9 -5.1,9 -5.5,9.4 -5.5,12.375 -5.825,12.7 -7.622,12.7 -7.682,12.76 -7.682,14.882 -8.3,15.5 -9.85,15.5
GND on Mid-Layer 2 "Bottom Layer-No Net" (solid, remove dead copper, pour order 44): -0.5,-0.6 -0.796,-0.6 -1.3,-1.104 -1.46,-1.264 -1.46,-2.3 -1.46,-2.466 -1.026,-2.9 5.7,-2.9 6.1,-2.5 6.1,-1.7 5.6,-1.2 0.311,-1.2 0.1,-0.989 -0.289,-0.6 -0.5,-0.6
GND on Mid-Layer 2 "Bottom Layer-No Net" (solid, remove dead copper, pour order 36): 1.9,11.4 1.9,2.3 2.9,1.3 4.8,1.3 5.7,2.2 5.7,10.1 5.3,10.5 4.3,10.5 4.3,11.4
+3V3 on Mid-Layer 2 "Bottom Layer-No Net" (solid, remove dead copper, pour order 22): 4.1,11.3 4.1,10.219 4.8,9.519 4.8,3.7 3.8,2.7 2.3,2.7 1.7,2.1 1.7,0.8 2.6,-0.1 5.2,-0.1 6.617,1.317 6.617,9.883 5.2,11.3
+3V3 on Mid-Layer 2 "Bottom Layer-No Net" (solid, remove dead copper, pour order 24): -10.5,20.7 -10.5,16.825 -9.6,15.925 -4.793,15.925 -0.9,19.818 -0.9,22.2 -1.5,22.8 -8.4,22.8

## Other copper
Top Layer:
  region net VBUS: -14.615,16.3 -16.3,17.985 -16.3,19 -15.4,19.9 -14,19.9 -13.2,19.1 -13.2,16.9 -13.8,16.3
  region net GND: -14.8,-6.4 -15,-6.6 -18.6,-6.6 -19.3,-5.9 -19.3,-5.4 -22.5,-2.2 -22.5,2.125 -23.2,2.825 -23.2,4.3 -22.6,4.9 -20.8,4.9 -20.4,4.5 -20.4,-0.868 -18.868,-2.4 -15.658,-2.4 -14.8,-3.258
  region net +12V: -14.7,-1.685 -15.015,-2 -18.5,-2 -19.9,-0.6 -19.9,4.5 -19.1,5.3 -18.1,5.3 -17.4,4.6 -17.4,2.3 -14.7,-0.4
  region net NetC1_2: -18.1,7.684 -18.1,7.3 -15.9,5.1 -15.9,3.052 -12.9,0.052 -12.9,-5.6 -12.6,-5.9 -11.3,-5.9 -10.8,-5.4 -10.8,-1.804 -10.496,-1.5 -10.496,0.196 -12.6,2.3 -12.6,3.1 -14.4,4.9 -14.4,7.474 -14.8,7.874 -17.91,7.874
  region net NetBD1_2: 18.62,21.86 18.62,22.75 19.51,23.64 20.56,23.64 23.94,20.26 23.94,19.48 23.32,18.86 22.39,18.86 21.55,19.7
  region net NetBD1_3: 19.8,18.4 20.93,17.27 20.93,16.7 20.76,16.53 17.21,16.53 15.83,17.91 15.83,18.41 16.66,19.24 17.08,19.24 18.294,18.4
  region net GND: 7.9,23.5 8.5,24.1 9.6,24.1 10.3,23.8 12,22.6 12.1,22.5 12.1,21.81 11.29,21 9.1,21 7.9,22.2
  region net GND: -25.9,-6.2 -25.6,-6.5 -23.3,-6.5 -22.8,-6 -22.8,-2.776 -23.776,-1.8 -25.6,-1.8 -25.9,-2.1
  region net VBUS: -15.3,13.8 -16.3,12.8 -16.3,10.798 -15.802,10.3 -12.425,10.3 -11.7,11.025 -11.7,14.3 -12.7,15.3 -12.7,19.9 -15.3,19.9
Mid-Layer 1:
  pour cut-out: 3.575,9.5 3.575,8.825 3.6,8.8 3.933,8.8 3.933,9.467 3.9,9.5
Bottom Layer:
  region net W: 4.3,-18.9 4.4,-19 6.577,-19 7.1,-19.523 7.1,-21.223 7.477,-21.6 8.9,-21.6 13.8,-26.5 15.5,-26.5 17,-25 17,-22.6 15.9,-21.5 15.9,-14.8 13.6,-12.5 4.8,-12.5 4.3,-13
  region net V: -7.1,-12.3 -7.7,-12.9 -7.7,-18.6 -7.3,-19 -1.8,-19 -1.4,-19.4 -1.4,-21.6 -1.2,-21.8 1.2,-21.8 1.3,-21.7 1.3,-18.4 1.7,-18 1.7,-14.5 1.3,-14.1 -0.3,-14.1 -2.1,-12.3
  region net U: -20.4,-8.5 -20.4,-11.2 -20.2,-11.4 -18.8,-11.4 -18.3,-10.9 -18.3,-8.5 -18.5,-8.3 -20.2,-8.3
  region net U: -15.6,-20.6 -12.7,-23.5 -10.6,-23.5 -9.6,-22.5 -9.6,-12.7 -10.3,-12 -15.6,-12
  region net NetBD1_2: 24.6,8.88 24.6,7.14 25.91,7.14 26.62,7.85 29.42,7.85 29.6,8.03 29.6,10.47 29.24,10.83 26.55,10.83
  region net GND: -25.8,-6.4 -26.3,-5.9 -26.3,-3.3 -25.8,-2.8 -22.1,-2.8 -21.7,-3.2 -21.7,-6.3 -21.8,-6.4
  region net L: 15.1,-6.1 14.3,-5.3 14.3,-2.9 16.9,-0.3 21,-0.3 21.5,-0.8 21.5,-2.4 20.8,-3.1 19.4,-3.1 16.4,-6.1
  region net NetQ8_S: -3.4,-5.6 -3.4,-10 -3.2,-10.2 -1.5,-10.2 -1.3,-10 -1.3,-5.654 -1.5,-5.454 -3.254,-5.454
  region net NetQ6_S: -11.9,-5.2 -12.1,-5.4 -12.1,-8.975 -11.075,-10 -9.4,-10 -9.2,-9.8 -9.2,-6.2 -10.2,-5.2
  region net IB: 7.593,-10.4 7.096,-9.885 7.096,-8.896 6.1,-7.9 1.9,-7.9 -1,-5 -8.1,-5 -9.7,-3.4 -9.7,-3 0,-3 2.9,-5.9 6.9,-5.9 9.3,-8.3 10.4,-8.3 10.4,-10.4
  region net IB: -4.5,-7.6 -4.4,-7.5 -4.4,-5.2 -3.9,-4.7 -3.9,-4 -4.2,-3.7 -8.9,-3.7 -9.15,-3.95 -6.4,-6.7 -6.4,-7.4 -6.2,-7.6
  region net IB: -20.6,-3.5 -19.9,-2.8 -0.2,-2.8 0.4,-3.4 0.4,-4.7 -12.6,-4.7 -13,-5.1 -13,-6.9 -13.3,-7.2 -15.2,-7.2 -16,-6.4 -20.3,-6.4 -20.6,-6.1

## Silkscreen, mask and mechanical layers (free items; w line width, h text height)
Top Overlay:
  circle w0.2: c-23,16 r2
  circle w0.2: c21.5,6.5 r2
  circle w0.2: c-8,-26.5 r2
  lines w0.127: -31,-7.93 cw(c0,0) -31,7.93 -31,-7.93 ; -7.93,-31 ccw(c0,0) 7.93,-31 -7.93,-31 ; -7.93,31 cw(c0,0) 7.93,31 -7.93,31 ; 31,-7.93 ccw(c0,0) 31,7.93 31,-7.93
  text "张飞电子" at -2.6,-24.439 h3
  text "高速Foc驱动板" at -5.6,-27.417 h3
  text "DP2403BV100     20240219" at -9.8,-29.88 h1.8
Bottom Overlay:
  circle w0.2: c-8,-26.5 r2.5
Mechanical 1:
  circle w0.2: c-23,16 r1.6
  circle w0.2: c21.5,6.5 r1.6
  circle w0.2: c19,-13 r2
  circle w0.2: c0,0 r32
  circle w0.2: c-8,-26.5 r1.6
  lines w0.2: -31,-7.92 -31,7.92 ; -7.93,-31 7.93,-31 ; -7.93,31 7.93,31 ; 31,-7.93 31,7.93

## Text inside footprints (layer, text, board x,y; h text height)
C2: Bottom Overlay "+" at -4.3,29.7 h0.7 r45
C3: Bottom Overlay "+" at -12.791,20.229 h0.7 r45
C4: Bottom Overlay "+" at -16.434,6.452 h0.7